# Altium PCB protel_lowlevel_shield.PcbDoc
Units mil, origin at the board's own origin, x right, y up, seen from the top; angles counter-clockwise.
Board outline 2900 x 2900 mil, 2 copper layers (Top Layer, Bottom Layer); 36 components, 37 nets, 121 pads, 12 vias.
Unrouted connection lines stored in the file: 1.
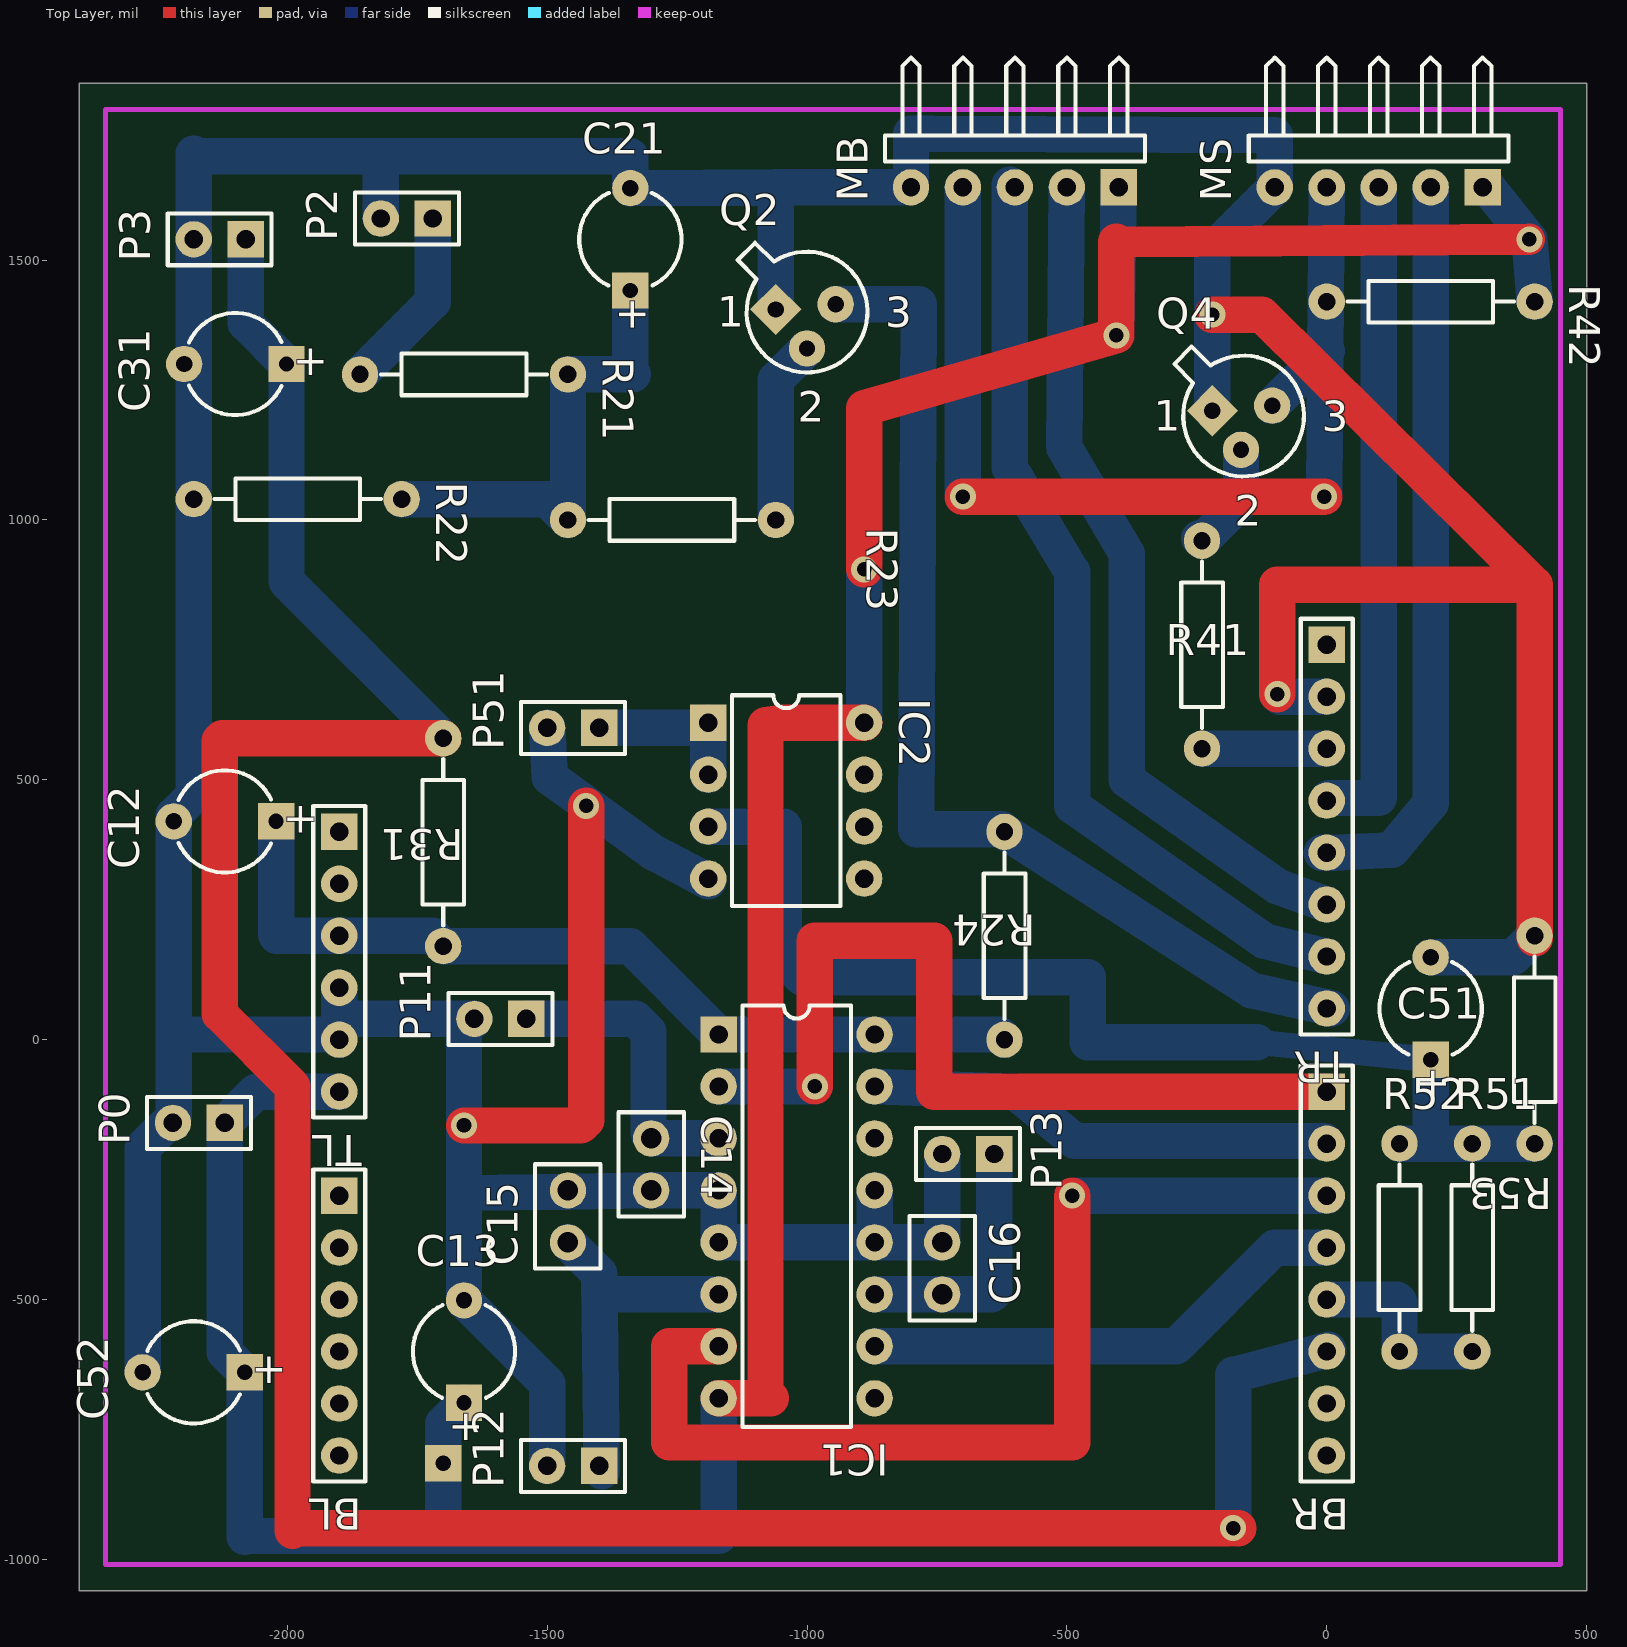
[diagram p0: Top Layer view]
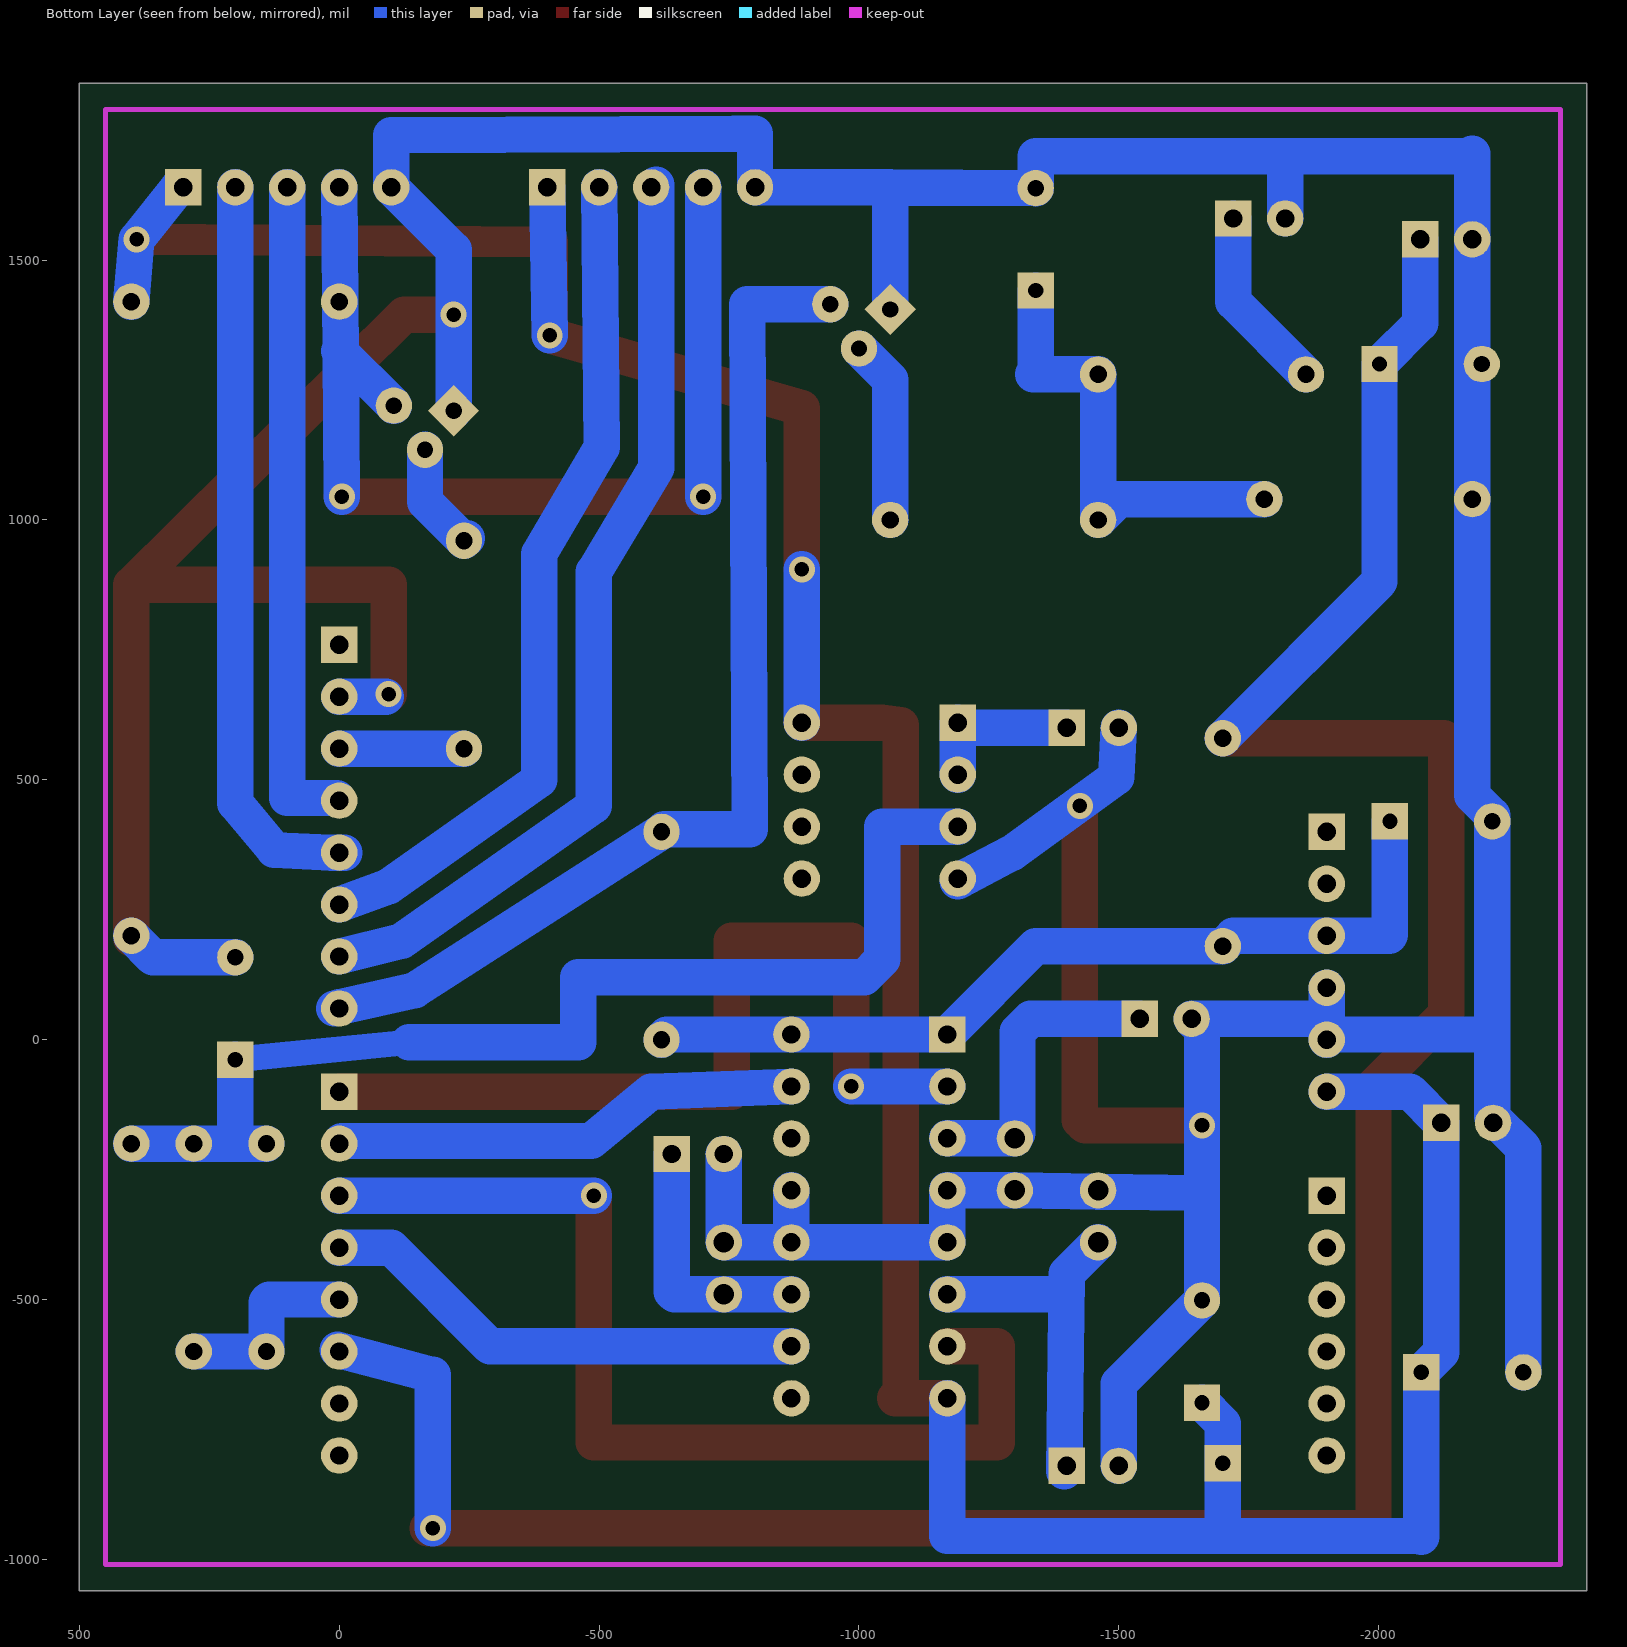
[diagram p1: Bottom Layer view, seen from below]

## Layer stack, top to bottom
Top Layer: signal copper 1.4
Dielectric: dielectric 12.6, FR-4, Dk 4.8
Bottom Layer: signal copper 1.4

## Board outline
-2400,-1060 500,-1060 500,1840 -2400,1840

## Design rules (kind name [scope] priority, off if disabled: settings)
Clearance [All] p1: gap=7
ComponentClearance [All] p1: gap=10 collisioncheckmode=0
PolygonConnect [All] p1: connectstyle=Relief reliefconductorwidth=10 reliefentries=4 polygonreliefangle="90 Angle"
RoutingVias [All] p1: holewidth=32 width=62 viastyle="Through Hole" minholewidth=28 minwidth=50 maxholewidth=28 maxwidth=50
SolderMaskExpansion [All] p1: expansion=4
TestPointUsage [All] p1: valid=0 allowmultiple=FALSE
Testpoint [All] p1: side=15 testpointundercomponent=TRUE minsize=40 maxsize=100 preferedsize=60 minholesize=0 maxholesize=40 preferedholesize=32 testpointgrid=1 style=1023 order=1234567890
Width [All] p1: maxlimit=100 minlimit=10 preferedwidth=70
17 further rules are at their usual default settings.

## Components (designator, comment, footprint, x,y, rotation, side; value= is the part's Value field where it differs from the comment)
BL "Analog" HDR1X6 -1900,-300 r270 top
BR "rx,tx,2to7" HDR1X8 0,-100 r270 top
C12 "Cap Pol1" CAPPR5-5x5 -2120,420 r180 top
C13 "Cap Pol1" CAPPR5-5x5 -1660,-600 r90 top
C14 "Cap" CAPR2.54-5.1x3.2 -1300,-240 r270 top
C15 "Cap" CAPR2.54-5.1x3.2 -1460,-340 r90 top
C16 "Cap" CAPR2.54-5.1x3.2 -740,-440 r90 top
C21 "Cap Pol1" CAPPR5-5x5 -1340,1540 r90 top
C31 "Cap Pol1" CAPPR5-5x5 -2100,1300 r180 top
C51 "Cap Pol1" CAPPR5-5x5 200,60 r90 top
C52 "Cap Pol1" CAPPR5-5x5 -2180,-640 r180 top
IC1 "L293D" DIP16 -1020,-340 r270 top
IC2 "LM358N" 626-05 -1040,460 r270 top
MB "Steer" HDR1X5H -400,1640 r180 top
MS "Brake" HDR1X5H 300,1640 r180 top
P0 "12 volts connector" HDR1X2 -2120,-160 r180 top
P2 "Automode Circuit Breaker" HDR1X2 -1720,1580 r180 top
P3 "Emergency Switch" HDR1X2 -2080,1540 r180 top
P11 "Right Blinker" HDR1X2 -1540,40 r180 top
P12 "Left Blinker" HDR1X2 -1400,-820 r180 top
P13 "Stop Light" HDR1X2 -640,-220 r180 top
P51 "Throttle Pwm" HDR1X2 -1400,600 r180 top
Q2 "2N3904" CAN-3/D5.9#1 -1000,1400 r0 top
Q4 "2N3904" CAN-3/D5.9#2 -160,1200 r0 top
R21 "Res2" AXIAL-0.4 -1660,1280 r0 top
R22 "Res2" AXIAL-0.4 -1980,1040 r0 top
R23 "Res2" AXIAL-0.4 -1260,1000 r0 top
R24 "Res2" AXIAL-0.4 -620,200 r270 top
R31 "Res2" AXIAL-0.4 -1700,380 r270 top
R41 "Res2" AXIAL-0.4 -240,760 r90 top
R42 "Res2" AXIAL-0.4 200,1420 r0 top
R51 "Res2" AXIAL-0.4 280,-400 r90 top
R52 "Res2" AXIAL-0.4 140,-400 r90 top
R53 "Res2" AXIAL-0.4 400,0 r270 top
TL "Power" HDR1X6 -1900,400 r270 top
TR "Pins 8 to 13,gnd&aref" HDR1X8 0,760 r270 top

## Footprints (in the part's own frame and the unit in brackets; to place one, negate y for a bottom-side part, rotate by r counter-clockwise, add the part's x,y. Pads: shape width x height; smd on the part's side, far side on the other; paste and mask are expansions set on the pad)
626-05 [mil] "DIP; 8 Leads; Row Spacing 7.62 mm; Pitch 2.54 mm"
  rect 70x70 hole 35.43: 1(-150,-150)
  round 70 hole 35.43: 2(-50,-150) 3(50,-150) 4(150,-150) 5(150,150) 6(50,150) 7(-50,150) 8(-150,150)
  silkscreen extent -203,-104 203,104
AXIAL-0.4 [mil] "Resistor; 2 Leads"
  round 70 hole 33.46: 1(-200,0) 2(200,0)
  silkscreen extent -160,-40 160,40
CAN-3/D5.9#1 [mil] "Can; 3 Leads; Pin Circle Dia. 2.54 mm"
  rect 70x70 hole 31.5 rot 45: 1(-60,5)
  round 70 hole 31.5: 2(0,-70) 3(55,15)
  silkscreen extent -133,-116 116,133
CAN-3/D5.9#2 [mil] "Can; 3 Leads; Pin Circle Dia. 2.54 mm"
  rect 70x70 hole 31.5 rot 45: 1(-60,10)
  round 70 hole 31.5: 2(-5,-65) 3(55,20)
  silkscreen extent -133,-116 116,133
CAPPR5-5x5 [mil] "Capacitor, Electrolytic, Radial; Body 5 x 5 mm (Dia.xH typ); Pin Spacing 5 mm (typ)"
  rect 70x70 hole 29.53: 1(-98.43,0)
  round 70 hole 31.5: 2(98.43,0)
  silkscreen extent -89,-98 89,98
CAPR2.54-5.1x3.2 [mil] "Capacitor, Ceramic, Thru-Hole, Dipped Radial; Body 5.1 x 3.2 mm (WxT) Pin Spacing 2.54 mm (typ)"
  round 70 hole 39.37: 1(-50,0) 2(50,0)
  silkscreen extent -100,-63 100,63
DIP16 [mil] "DIP; 16 Leads; Row Spacing 7.62 mm; Pitch 2.54 mm"
  rect 70x70 hole 35.43: 1(-350,-150)
  round 70 hole 35.43: 2(-250,-150) 3(-150,-150) 4(-50,-150) 5(50,-150) 6(150,-150) 7(250,-150) 8(350,-150) 9(350,150) 10(250,150) 11(150,150) 12(50,150) 13(-50,150) 14(-150,150) 15(-250,150) 16(-350,150)
  silkscreen extent -406,-104 406,104
HDR1X2 [mil] "Connector; Header; 2 Position"
  rect 70x70 hole 35.43: 1(0,0)
  round 70 hole 35.43: 2(100,0)
  silkscreen extent -50,-50 150,50
HDR1X5H [mil] "Connector; Header; 5 Position; Right Angle"
  rect 70x70 hole 35.43: 1(0,0)
  round 70 hole 35.43: 2(100,0) 3(200,0) 4(300,0) 5(400,0)
  silkscreen extent -50,-250 450,-50
HDR1X6 [mil] "Connector; Header; 6 Position"
  rect 70x70 hole 35.43: 1(0,0)
  round 70 hole 35.43: 2(100,0) 3(200,0) 4(300,0) 5(400,0) 6(500,0)
  silkscreen extent -50,-50 550,50
HDR1X8 [mil] "Connector; Header; 8 Position"
  rect 70x70 hole 35.43: 1(0,0)
  round 70 hole 35.43: 2(100,0) 3(200,0) 4(300,0) 5(400,0) 6(500,0) 7(600,0) 8(700,0)
  silkscreen extent -50,-50 750,50

## Part data
BL TL: library part "Header 6H", "Header, 6-Pin, Right Angle"
BR TR: library part "Header 8H", "Header, 8-Pin, Right Angle"
C12 C13 C21 C31 C51 C52: "Polarized Capacitor (Radial)"
C14 C15 C16: "Capacitor"
IC1: "Push-Pull Four Channel Driver With Diode"
IC2: "Dual Low-Power Operational Amplifier"
MB MS: library part "Header 5H", "Header, 5-Pin, Right Angle"
P0 P2 P3 P11 P12 P13 P51: library part "Header 2", "Header, 2-Pin"
Q2 Q4: library part 2N2222, "General Purpose Transistor NPN Silicon"
R21 R22 R23 R24 R31 R41 R42 R51 R52 R53: "Resistor"

## Free pads (board coordinates)
  rect 70x70 hole 30: 1(-1700,-815)

## Via types
v1: diameter 50, hole 28, Top Layer to Bottom Layer, 12 vias

## Nets (pads, with @x,y where several pads share a name; then routed paths per layer and width w, separated by ;. In a path a pad name is that pad's centre, name@x,y a point inside that pad or via, vN(x,y) a via of type N, cw(c..) or ccw(c..) an arc to the next point about the centre after c; other vN are vias at no path point)
3.3V: TL.2
5V: C12.1 IC1.1 IC1.9 IC1.16 R24.2 R31.2 TL.3 | length 2543.5
  Bottom Layer w70: C12.1 -2021.57,201.57 -2020,200 ; R24.2 R24.2@-630,10 ; -2020,200 R31.2@-1720,200 ; -2020,200 TL.3 R31.2@-1720,200 ; R31.2@-1720,200 R31.2 -1340,180 IC1.1 ; IC1.1 R24.2@-630,10 ; IC1.1 IC1.16 R24.2@-630,10
12V: C13.1 C52.1 IC1.8 IC2.8 MB.1 MS.1 P0.1 pad.1 R42.2 TL.6 | length 6715.4
  Top Layer w60: -405,1535 v1(390,1540)
  Top Layer w70: IC1.8 -1070,-690 -1080,-685 -1080,605 -1045,610 IC2.8 ; v1(-890,905) -890,1215 v1(-405,1355) -405,1535
  Bottom Layer w70: -2081.57,-956.57 C52.1 -2120,-601.57 P0.1 -2060,-100 TL.6 ; -2080,-955 -1170,-955 IC1.8 ; -1700,-955 -1700,-738.43 C13.1 ; IC2.8 v1(-890,905) ; v1(-405,1355) MB.1 ; MS.1@310,1640 v1(390,1540) R42.2
A0: BL.1
A1: BL.2
A2: BL.3
A3: BL.4
A4: BL.5
A5: BL.6
AREF: TR.1
AUTO_MODE_PIN: Q2.3 R24.1 TR.8 | length 2217.3
  Bottom Layer w70: Q2.3 -785,1415 -790,405 R24.1@-625,405 ; R24.1 -145,95 ; -145,95 0.49,62.15 10,60 0.52,62.23 -145,95
BRAKE_DIR_PIN: MS.3 TR.4 | length 1270
  Bottom Layer w70: TR.4@5,465 100,465 MS.3
BRAKE_PULSE_PIN: MS.2 TR.5 | length 1462.3
  Bottom Layer w70: MS.2 200,455 125,365 TR.5@15,360 ; TR.5 -10,360 TR.5 ; TR.5 TR.5@15,360 ; TR.5 TR.5@15,360
EMERGENCY_PIN: BR.6 C31.1 P3.1 R31.1 | length 5434.3
  Top Layer w70: R31.1 -2125,580 -2130,575 -2130,50 -1990,-90 -1990,-945 -1985,-940 v1@-170,-940
  Bottom Layer w70: P3.1 -2080,1378.43 C31.1 -2001.57,881.57 R31.1 ; v1(-180,-940) -180,-645 BR.6@3.45,-596.55
GND: C12.2 C13.2 C14.2 C15.2 C16.2 C21.2 C31.2 C51.2 C52.2 IC1.4 IC1.5 IC1.12 IC1.13 IC2.4 MB.5 MS.5 P0.2 P2.2 P3.2 P11.2 P12.2 P13.2 P51.2 Q2.1 Q4.1 R22.1 R53.1 TL.4 TL.5 TR.2 | length 15359.3
  Top Layer w70: v1(-1660,-165) -1435,-165 -1425,-155 v1(-1425,450) ; v1(-220,1395) -125,1395 400,875 ; v1(-95,665) -95,875 400,875 ; R53.1@400,195 400,875
  Bottom Layer w70: C52.2 -2278.43,-208.43 -2218.43,-148.43 -2218.43,431.57 -2180,470 -2180,1318.43 -2180,1705 ; -2218.43,10 -1910,10 -1880,40 P11.2 -1660,20 C13.2 -1500,-661.57 P12.2 ; -2215,1.57 -2213.43,0 ; R22.1 -2180,1300 P3.2 -2180,1705 ; TL.5 TL.4 ; -1660,-295 -1459.97,-292.22 C14.2 IC1.4 IC1.5 ; P51.2 -1495,505 -1295,360 ; P13.2 C16.2 ; Q4.1 -220,1520 MS.5 -100,1740 -760,1743 -800,1743 MB.5 ; v1@-90,660 TR.2 ; C51.2 358.43,158.43 R53.1 ; -2180,1705 -2175,1700 ; -2175,1700 -1340,1700 ; -2175,1700 -1820,1700 ; -1820,1700 P2.2 -1820,1700 ; -1820,1700 -1340,1700 ; C21.2 MB.5 ; C21.2 -1060,1640 ; C21.2 -1340,1700 ; -1295,360 -1190,305 -1192.12,306.18 -1295,360 ; IC1.5 C16.2 ; IC1.5 IC1.12 ; -1060,1640 Q2.1 -1060,1640 ; -1060,1640 MB.5 ; IC1.12 IC1.13 IC1.12 ; IC1.12 C16.2
L293_1_PIN: BR.1 IC1.2 | length 1740
  Top Layer w70: v1(-985,-90) -985,190 -755,190 -755,-100 BR.1
  Bottom Layer w70: IC1.2 v1(-985,-90)
L293_2_PIN: BR.3 IC1.7 | length 2020
  Top Layer w70: IC1.7 -1265,-590 -1265,-775 -490,-775 v1(-490,-300)
  Bottom Layer w70: v1(-490,-300) BR.3
L293_3_PIN: BR.4 IC1.10 | length 948.7
  Bottom Layer w70: IC1.10 -290,-590 -100,-400 BR.4
L293_4_PIN: BR.2 IC1.15 | length 899.3
  Bottom Layer w70: IC1.15 -600,-100 -485,-195 BR.2@-5,-195
LEFT_BLINKER_PIN: C15.1 IC1.6 P12.1 | length 694.9
  Bottom Layer w70: C15.1 -1400,-450 P12.1@-1395,-830 ; -1400,-490 IC1.6
MOTOR_ENABLE: MB.4 MS.4 Q4.3 R42.1 | length 2033.5
  Top Layer w70: v1(-700,1045) v1(-5,1045)
  Bottom Layer w70: v1(-700,1045) MB.4 ; Q4.3 0,1325 ; v1(-5,1045) -2.67,1322.33 -1.85,1420.02 MS.4
MOTORS_ENABLE_PIN: R41.1 TR.3 | length 240
  Bottom Layer w70: R41.1 TR.3
NetC21_1: C21.1 R21.2 R22.2 R23.1 | length 905.2
  Bottom Layer w70: R22.2 -1500,1040 R23.1 R21.2 -1335,1280 -1340,1285 C21.1
NetC51_1: C51.1 IC2.3 R51.2 R52.2 R53.2 | length 2629.3
  Bottom Layer w50: -135,-5 C51.1
  Bottom Layer w70: IC2.3 -1045,410 -1045,155 -1010,120 -460,120 -460,-5 -135,-5 ; 200,-200 C51.1 200,-200 ; 200,-200 R51.2 R53.2 R52.2 200,-200
NetIC2_1: IC2.1 IC2.2 P51.1 | length 314.1
  Bottom Layer w70: P51.1 -1200,600 IC2.1 IC2.2
NETLABEL11: IC1.14
NetP2_1: P2.1 R21.1 | length 358
  Bottom Layer w70: R21.1 -1720,1420 P2.1
NetQ2_2: Q2.2 R23.2 | length 354.9
  Bottom Layer w70: R23.2 -1060,1270 Q2.2
NetQ4_2: Q4.2 R41.2 | length 213.1
  Bottom Layer w70: R41.2@-245,965 R41.2 -165,1035 Q4.2
RESET: TL.1
RIGHT_BLINKER_PIN: C14.1 IC1.3 P11.1 | length 570.4
  Bottom Layer w70: P11.1 -1330,40 -1305,15 C14.1@-1305,-180 ; C14.1 IC1.3
RX: BR.8
STEER_DIR_PIN: MB.3 TR.7 | length 2349.1
  Bottom Layer w70: TR.7 -120,190 -490,450 -490,900 -610,1100 ; -610,1100 -610,1645 -610,1640 -610,1100
STEER_PULSE_PIN: MB.2 TR.6 | length 1628.9
  Bottom Layer w70: MB.2 -505,1140 -385,935 -385,500 -95,295 TR.6
STOP_LIGHT_PIN: C16.1 IC1.11 P13.1 | length 722.1
  Bottom Layer w70: P13.1 -640,-485 -645,-490 ; -645,-490 IC1.11 C16.1 -645,-490
THROTTLE_PIN: BR.5 R51.1 R52.1 | length 377.1
  Bottom Layer w70: BR.5 135,-500 140,-505 R52.1 R51.1
TX: BR.7
pads on no net: IC2.5 IC2.6 IC2.7

## Keep-outs
Keep-Out Layer:
  lines w10: -2350,-1010 -2350,1790 450,1790 450,-1010 -2350,-1010

## Text inside footprints (layer, text, board x,y; h text height)
C12: Top Overlay "+" at -1940.87,449.53 h59.06 r180
C13: Top Overlay "+" at -1630.47,-779.13 h59.06 r90
C21: Top Overlay "+" at -1310.47,1360.87 h59.06 r90
C31: Top Overlay "+" at -1920.87,1329.53 h59.06 r180
C51: Top Overlay "+" at 229.53,-119.13 h59.06 r90
C52: Top Overlay "+" at -2000.87,-610.47 h59.06 r180
Q2: Top Overlay "1" at -1172.44,1371.69 h59.06; Top Overlay "2" at -1017.44,1189.17 h59.05; Top Overlay "3" at -849.92,1370.79 h59.05
Q4: Top Overlay "1" at -332.44,1171.69 h59.06; Top Overlay "2" at -177.44,989.17 h59.05; Top Overlay "3" at -9.92,1170.79 h59.05